# Altium PCB linkit-v4-0.3_6layers.PcbDoc (part 2 of 6)
Units mm, origin at the board's own origin, x right, y up, seen from the top; angles counter-clockwise.
Board outline 70 x 35 mm, 6 copper layers (Top Layer, Int1 (GND), Int2 (Sign), Int3 (Sign), Int4 (PWR), Bottom Layer), stack 1.551 mm thick; 185 components, 156 nets, 761 pads, 1071 vias.
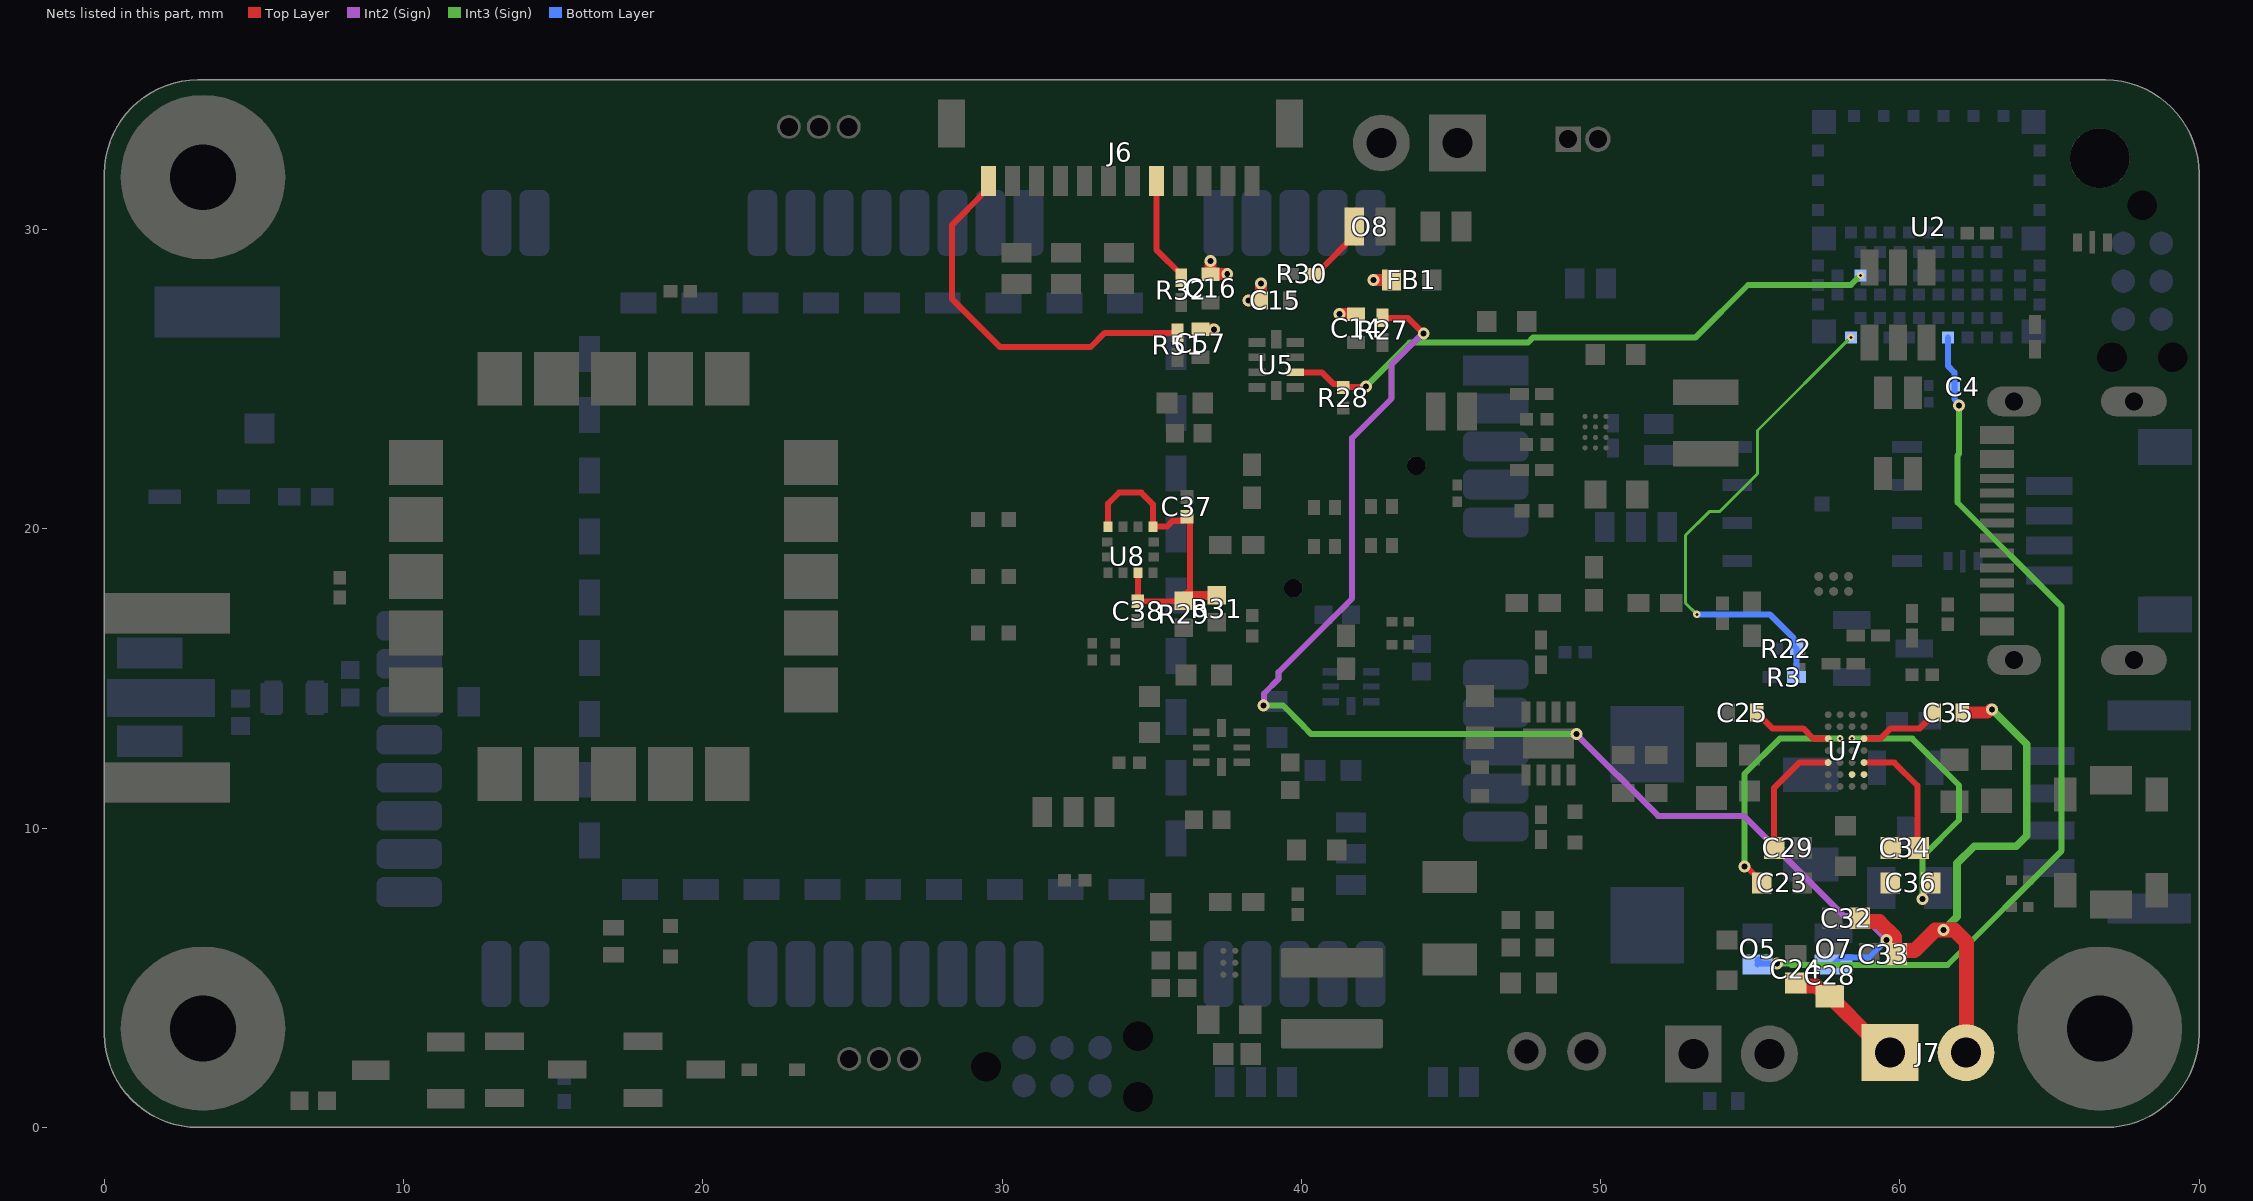
[diagram p6: the nets of this part, all layers, seen from the top]

## Footprints (in the part's own frame and the unit in brackets; to place one, negate y for a bottom-side part, rotate by r counter-clockwise, add the part's x,y. Pads: shape width x height; smd on the part's side, far side on the other; paste and mask are expansions set on the pad) (continued)
"KIM2 FOOTPRINT" [mm] "KIM2-FLEX Module 36.6x25.4x5mm"
  rect 2.2x1 smd mask+0.075: 1(-18.15,7.62)
  round 0.5 on Mech9 paste+0 mask+0.1: 1(-17.55,7.62) 2(-17.55,6.35) 4(-17.55,3.81) 6(-17.55,-2.54) 7(-17.55,-3.81) 9(-17.55,-6.35) 37(5.08,11.95) 40(1.27,11.95) 42(-1.27,11.95) 43(-2.54,11.95) 45(-10.16,11.95) 47(-12.7,11.95) 48(-13.97,11.95)
  rrect50% 2.2x1 smd mask+0.075: 2(-18.15,6.35) 3(-18.15,5.08) 4(-18.15,3.81) 5(-18.15,2.54) 6(-18.15,-2.54) 6(-18.15,-2.54) 7(-18.15,-3.81) 7(-18.15,-3.81) 8(-18.15,-5.08) 8(-18.15,-5.08) 9(-18.15,-6.35) 9(-18.15,-6.35) 10(-18.15,-7.62) 10(-18.15,-7.62) 26(18.15,-9.8) 27(18.15,-8.53) 28(18.15,-7.26) 29(18.15,-5.99) 30(18.15,-4.72) 31(18.15,-3.45) 32(18.15,-2.18) 33(18.15,-0.91)
  round 0.5 on Mech9 paste-127 mask+0: 3(-17.55,5.08) 5(-17.55,2.54) 8(-17.55,-5.08) 10(-17.55,-7.62) 11(-13.97,-11.95) 12(-12.7,-11.95) 13(-11.43,-11.95) 14(-10.16,-11.95) 15(-8.89,-11.95) 16(-2.54,-11.95) 17(-1.27,-11.95) 18(0,-11.95) 19(1.27,-11.95) 20(2.54,-11.95) 21(3.81,-11.95) 22(5.08,-11.95) 23(6.35,-11.95) 24(13.97,-11.95) 25(15.24,-11.95) 26(17.55,-9.8) 27(17.55,-8.53) 28(17.55,-7.26) 29(17.55,-5.99) 30(17.55,-4.72) 31(17.55,-3.45) 32(17.55,-2.18) 33(17.55,-0.91) 34(15.24,11.95) 35(13.97,11.95) 36(6.35,11.95) 38(3.81,11.95) 39(2.54,11.95) 41(0,11.95) 44(-8.89,11.95) 46(-11.43,11.95)
  rrect50% 1x2.2 smd mask+0.075: 11(-13.97,-12.55) 12(-12.7,-12.55) 13(-11.43,-12.55) 14(-10.16,-12.55) 15(-8.89,-12.55) 16(-2.54,-12.55) 17(-1.27,-12.55) 18(0,-12.55) 19(1.27,-12.55) 20(2.54,-12.55) 21(3.81,-12.55) 22(5.08,-12.55) 23(6.35,-12.55) 24(13.97,-12.55) 25(15.24,-12.55) 34(15.24,12.55) 35(13.97,12.55) 36(6.35,12.55) 37(5.08,12.55) 38(3.81,12.55) 39(2.54,12.55) 40(1.27,12.55) 41(0,12.55) 42(-1.27,12.55) 43(-2.54,12.55) 44(-8.89,12.55) 45(-10.16,12.55) 46(-11.43,12.55) 47(-12.7,12.55) 48(-13.97,12.55)
  silkscreen extent -18.8,-13.2 18.8,13.2, body extent -18.32,-12.72 18.33,12.73, height 4.8
"LED RGB 0603" [mm]
  rect 0.5x0.4 smd: 1(-0.65,0.35) 2(-0.65,-0.35) 3(0.65,-0.35) 4(0.65,0.35)
  silkscreen extent -1.26,-0.7 0.25,0.7, body extent -0.8,-0.4 0.8,0.4, height 0.51
LGA12-BMA400 [mm]
  rect 0.3x0.35 smd: 1(-0.75,-0.775) 2(-0.25,-0.775) 3(0.25,-0.775) 4(0.75,-0.775) 7(0.75,0.775) 8(0.25,0.775) 9(-0.25,0.775) 10(-0.75,0.775)
  rect 0.35x0.3 smd: 5(0.775,-0.25) 6(0.775,0.25) 11(-0.775,0.25) 12(-0.775,-0.25)
  round 0.2 on Top Overlay: ""(-0.975,-1.225)
  Top Layer pour cut-out: -1.05,1.05 -1.05,-1.05 1.05,-1.05 1.05,1.05
  body extent -1,-1 1,1, height 1
LQW18AN10NG80D [mm]
  rect 0.57x1.15 smd: 1(-0.715,0) 2(0.715,0)
  silkscreen extent 0,-0.3 0,0.3, body extent -0.82,-0.5 0.82,0.5, height 0.9
"Mounting Hole M2 Plated" [mm]
  round 5.5 hole 2.2: 1(0,0)
"MOUNTING HOLE M2 UNPLATED" [mm]
  round 2 hole 2 unplated mask+0: 0(0,0)
  silkscreen extent -1.5,-1.5 1.5,1.5
MS421R_IV03E [mm]
  rect 1x1 smd paste+0 mask+0: +(2.022,2.032)
  rect 4.2x1.7 smd paste+0 mask+0: -(0.6,-1.85)
  Top Layer region: 0.22,2.705 2.705,2.705 2.705,0.22
R0402 [mm]
  rect 0.51x0.7 smd mask+0.05: 1(-0.45,0) 2(0.45,0)
  body extent -0.52,-0.3 0.52,0.3, height 0.4
RCC0603_e3 [mm]
  rect 0.75x1 smd: 1(-0.75,0) 2(0.75,0)
  body extent -0.77,-0.42 0.78,0.43, height 0.45
RES0201L [mm]
  rect 0.36x0.32 smd: 1(-0.28,0) 2(0.28,0)
  body extent -0.31,-0.16 0.31,0.16, height 0.3
RES0201N [mm]
  rect 0.46x0.42 smd: 1(-0.33,0) 2(0.33,0)
  silkscreen extent -0.5,-0.38 0.5,0.37, body extent -0.31,-0.16 0.31,0.16, height 0.3
RES0402L [mm]
  rect 0.5x0.45 smd: 1(-0.4,0) 2(0.4,0)
  body extent -0.55,-0.27 0.55,0.28, height 0.35
RES0402N [mm]
  rect 0.62x0.62 smd: 1(-0.45,0) 2(0.45,0)
  silkscreen extent -0.95,-0.5 0.95,0.5, body extent -0.52,-0.27 0.53,0.28, height 0.4
RES0402N_NF [mm]
  rect 0.62x0.62 smd: 1(-0.45,0) 2(0.45,0)
  silkscreen extent -0.95,-0.5 0.95,0.5
RESC0603X26N [mm]
  rect 0.44x0.42 smd: 1(-0.34,0) 2(0.34,0)
  body extent -0.3,-0.15 0.3,0.15, height 0.26
RESC0603X28N [mm]
  rect 0.625x0.4 smd: 1(-0.412,0) 2(0.412,0)
  body extent -0.3,-0.15 0.3,0.15, height 0.28
RESC1005X40N [mm]
  rect 0.75x0.6 smd: 1(-0.55,0) 2(0.55,0)
  body extent -0.49,-0.25 0.51,0.25, height 0.35
RESC2012X60N [mm]
  rect 0.95x1.4 smd: 1(-0.95,0) 2(0.95,0)
  silkscreen extent 0,-0.53 0,0.53, body extent -1,-0.63 1,0.63, height 0.6
RESC3216X55N [mm]
  rect 1.15x1.85 smd: 1(-1.5,0) 2(1.5,0)
  silkscreen extent 0,-0.7 0,0.7, body extent -1.6,-0.8 1.6,0.8, height 0.55
S2BPHKS [mm]
  round 1.3 hole 0.8: 1(0,0) 2(-2,0)
  silkscreen extent -3.95,-1.35 1.95,2.49, body extent -3.95,-1.35 1.95,6.25, height 4.9
SAMM10Q00B [mm]
  rect 1.8x1.5 smd: 1(-6.6,3.8) 2(-6.6,1.9) 3(-6.6,0) 4(-6.6,-1.9) 5(-6.6,-3.8) 11(6.6,-3.8) 12(6.6,-1.9) 13(6.6,0) 14(6.6,1.9) 15(6.6,3.8)
  rect 1.5x1.8 smd: 6(-3.8,-6.6) 7(-1.9,-6.6) 8(0,-6.6) 9(1.9,-6.6) 10(3.8,-6.6) 16(3.8,6.6) 17(1.9,6.6) 18(0,6.6) 19(-1.9,6.6) 20(-3.8,6.6)
  silkscreen extent -8.35,-7.75 7.75,7.75, body extent -7.75,-7.75 7.75,7.75, height 6.3
SMT-JUMPER_2_NC_TRACE_SILK [mil] "SMT-JUMPER_2_NC_TRACE_SILK"
  rect 26x50 smd paste+0: 1(-20.5,0) 2(20.5,0)
  Top Layer region: -27.75,5.25 1.25,5.25 1.25,-5.25 -27.75,-5.25
  Top Layer region: -1.25,5.25 27.75,5.25 27.75,-5.25 -1.25,-5.25
SMT-JUMPER_2_NO_TRACE_SILK [mil] "SMT-JUMPER_2_NC_TRACE_SILK"
  rect 26x39.37 smd paste+0: 1(-20.5,0) 2(20.5,0)
SMT-JUMPER_3_2-NCLEFT_TRACE_SILK [mil] "SMT-JUMPER_3_2-NC_TRACE_SILK"
  rect 26x39.37 smd paste+0: 1(-41,0) 2(0,0) 3(41,0)
  Top Layer region: -48.75,5.25 -19.75,5.25 -19.75,-5.25 -48.75,-5.25
  Top Layer region: -21.25,5.25 10,5.25 10,-5.25 -21.25,-5.25
SOD2512X80N [mm]
  rect 1.1x0.5 smd: 1(-1.15,0) 2(1.15,0)
  silkscreen extent -1.7,-0.62 0.85,0.62, body extent -1.25,-0.63 1.25,0.63, height 0.8
SODFL1608X65N [mm]
  rect 0.53x0.42 smd: 1(-0.8,0) 2(0.8,0)
  silkscreen extent -0.33,-0.4 0.33,0.4, body extent -0.8,-0.41 0.8,0.42, height 0.61
SON50P200X200X80-9N [mm]
  rect 0.7x0.3 smd: 1(-1.05,0.75) 2(-1.05,0.25) 3(-1.05,-0.25) 4(-1.05,-0.75) 5(1.05,-0.75) 6(1.05,-0.25) 7(1.05,0.25) 8(1.05,0.75)
  rect 1x1.7 smd: 9(0,0)
  silkscreen extent -1.52,1.27 -1.28,1.52, body extent -1.05,-1 1.05,1, height 0.8
SON127P600X80_HS-9N [mm]
  rect 1x0.4 smd: 1(-2.84,1.905) 2(-2.84,0.635) 3(-2.84,-0.635) 4(-2.84,-1.905) 5(2.84,-1.905) 6(2.84,-0.635) 7(2.84,0.635) 8(2.84,1.905)
  rect 0.5x0.5 smd paste-1.7: 9(0,0)
  Top Layer region: -1.7,1.999 1.7,1.999 1.7,-2.001 -1.7,-2.001
  silkscreen extent -3.5,-2.6 3.1,2.65, body extent -3,-2.5 3,2.5, height 0.8
SOT95P237X112-3N [mm]
  rect 1.3x0.6 smd: 1(-1.05,0.95) 2(-1.05,-0.95) 3(1.05,0)
  silkscreen extent -1.7,-1.46 0.05,1.5, body extent -1.18,-1.46 1.18,1.46, height 1.12
SOT95P280X140-3N [mm]
  rect 1.25x0.65 smd: 1(-1.25,0.95) 2(-1.25,-0.95) 3(1.25,0)
  silkscreen extent -1.88,-1.45 0.27,1.53, body extent -1.4,-1.45 1.4,1.45, height 1.4
SOT95P280X145-6N [mm]
  rect 1.2x0.6 smd: 1(-1.25,0.95) 2(-1.25,0) 3(-1.25,-0.95) 4(1.25,-0.95) 5(1.25,0) 6(1.25,0.95)
  silkscreen extent -1.85,-1.46 0.3,1.6, body extent -1.4,-1.46 1.4,1.46, height 1.45
SOT96P237X111-3N [mm]
  rect 1.25x0.6 smd: 1(-1.05,0.955) 2(-1.05,-0.955) 3(1.05,0)
  silkscreen extent -1.67,-1.46 0.07,1.51, body extent -1.18,-1.46 1.18,1.46, height 1.11
SOT96P240X115-3N [mm]
  rect 1.15x0.6 smd: 1(-1.1,0.96) 2(-1.1,-0.96) 3(1.1,0)
  silkscreen extent -1.67,-1.45 0.18,1.51, body extent -1.2,-1.45 1.2,1.45, height 1.15
SPARKFUN_PRT-14417 [mm]
  rect 0.6x1.55 smd: 1(-1.5,2.45) 2(-0.5,2.45) 3(0.5,2.45) 4(1.5,2.45)
  rect 1.2x1.8 smd: S1(-2.8,-1.425) S2(2.8,-1.425)
  silkscreen extent -3,-2.13 3,3.85, body extent -3,-2.03 3,2.92, height 2.96
stm32wl-SMD_noLegs [mm]
  rect 0.7x1.2 smd: 0(0.2,1.905) 1(0.2,3.937) 2(0.2,5.969) 3(0.2,8.001) 4(0.2,10.033) 5(0.2,12.065) 6(0.2,14.097) 7(0.2,16.129) 8(0.2,18.161) 18(19.8,18.095) 19(19.8,16.063) 20(19.8,14.031) 21(19.8,11.999) 22(19.8,9.967) 23(19.8,7.935) 24(19.8,5.903) 25(19.8,3.871) 26(19.8,1.839)
  rect 1.2x0.7 smd: 9(1.9,19.8) 10(3.932,19.8) 11(5.964,19.8) 12(7.996,19.8) 13(10.028,19.8) 14(12.06,19.8) 15(14.092,19.8) 16(16.124,19.8) 17(18.156,19.8) 27(18.111,0.2) 28(16.079,0.2) 29(14.047,0.2) 30(12.015,0.2) 31(9.983,0.2) 32(7.951,0.2) 33(5.919,0.2) 34(3.887,0.2) 35(1.855,0.2)
  silkscreen extent 0,0 20,20, body extent 0,0 20,20, height 2.05
TC2030NL [mm]
  round 0.787 smd paste-0.787: 1(1.27,-0.635) 2(1.27,0.635) 3(2.54,-0.635) 4(2.54,0.635) 5(3.81,-0.635) 6(3.81,0.635)
  round 0.65 hole 0.991 unplated: H1(0,0) H2(5.08,1.016) H3(5.08,-1.016)
TL1015 [mm]
  rect 0.95x1.4 smd: 1(-2.075,0) 2(2.075,0)
  rect 1.15x0.75 smd: G1(-1.6,1.525) G2(1.6,1.525) G3(1.6,-1.525) G4(-1.6,-1.525)
  silkscreen extent -2.38,-1.6 2.38,1.6, body extent -2.3,-1.5 2.3,1.5, height 2
TPS22960RSER [mm]
  rect 0.55x0.25 smd: 1(-0.675,0.5) 3(-0.675,-0.5) 5(0.675,-0.5) 7(0.675,0.5)
  rect 0.55x0.2 smd: 2(-0.675,0) 6(0.675,0)
  rect 0.3x0.6 smd: 4(0,-0.65) 8(0,0.65)
  silkscreen extent -1.45,0.5 -1.35,0.6, body extent -0.75,-0.75 0.75,0.75, height 0.7
U.FL-R-SMT-1(10) [mm]
  rect 1.05x2.2 smd: 1(-1.475,0) 2(1.475,0)
  rect 1.05x1.05 smd: 3(0,1.525)
  body extent -1.5,-1.5 1.5,1.6, height 1.25
VLP-400-F [mm]
  round 0.62 hole 0.62 unplated paste-2539.97 mask-0.1: 1(-2.05,2.05) 2(2.05,-2.05)
  silkscreen extent -2.4,-2.4 2.41,2.41, body extent -2.34,-2.34 2.35,2.35, height 10.16
WE-CNSW-SMD [mm]
  rect 1.1x0.6 smd: 1(-1.35,-0.5) 2(1.35,-0.5) 3(1.35,0.5) 4(-1.35,0.5)
  silkscreen extent -1.37,-1.32 0.57,0.9, body extent -1.6,-0.8 1.6,0.8, height 1.8
XEL4020 [mm]
  rrect10% 0.98x3.4 smd: 1(-1.185,0) 2(1.185,0)
  body extent -2.15,-2.15 2.15,2.15, height 2.1
YFF15PC [mm]
  rect 0.3x0.6 smd: 1(-0.5,0) 2(0.5,0)
  rect 0.19x0.75 smd paste-0.19 mask-0.19: 3(0,0)
  silkscreen extent -0.8,-0.52 0.8,0.5, body extent -0.5,-0.3 0.5,0.3, height 0.31

## Part data
BT1: library part RELOWABLE_BATTERY_MS421R, "SEIKO Reflowable Lithium Batteries", DeviceName=_MS421R, DeviceSetName=RELOWABLE_BATTERY, GateName_1=G$1, LibraryName=SparkFun-Batteries, PROD_ID=BAT-16685, SymbolName_1=BATTERY
C1 C21: "Multilayer Ceramic Capacitors MLCC - SMD/SMT 1 uF 25 VDC 10% 0402 X5R", Manufacturer_Name="Murata Electronics", Mouser Part Number=81-GRM155R61E105KE1D, Arrow Part Number=GRM155R61E105KE11D, Arrow Price/Stock=https://www.arrow.com/en/products/grm155r61e105ke11d/murata-manufacturing?region=nac, Datasheet Link=http://www.murata.com/~/media/webrenewal/support/library/catalog/products/capacitor/mlcc/c02e.pdf, Height=0.55mm, Manufacturer_Part_Number=GRM155R61E105KE11D, Mouser Price/Stock=https://www.mouser.co.uk/ProductDetail/Murata-Electronics/GRM155R61E105KE11D?qs=QzBtWTOodeUQ00WJlpqFiw%3D%3D
C2: "Multilayer Ceramic Capacitors MLCC - SMD/SMT 1 uF 16 VDC 10% 0603 X7R AEC-Q200", Manufacturer_Name="Murata Electronics", Mouser Part Number=81-GCM188R71C105K64D, Arrow Part Number=GCM188R71C105KA64D, Arrow Price/Stock=https://www.arrow.com/en/products/gcm188r71c105ka64d/murata-manufacturing?region=nac, Datasheet Link=https://search.murata.co.jp/Ceramy/image/img/A01X/G101/ENG/GCM188R71C105KA64-04A.pdf, Height=0.9mm, Manufacturer_Part_Number=GCM188R71C105KA64D, Mouser Price/Stock=https://www.mouser.co.uk/ProductDetail/Murata-Electronics/GCM188R71C105KA64D?qs=bQrJpfqjX%252BKtVgLYIBGvIg%3D%3D
C3 C4 C6: library part "CAP CER 100NF 0201 35V 10% X5R", "CAP CER 100NF 0201 35V 10% X5R", Dielectric=X5R, Manufacturer=Murata, Manufacturers Part Number=GRM033R6YA104KE14D, Supplier Part Number 1=81-GRM33R6YA104KE14D, Tolerance=10%, Size=0201, Supplier 1=Mouser, Supplier 2=Digi-Key, Supplier Part Number 2=490-10430-1-ND
C5 C7: library part "CAP FEEDTHRU 470NF 0402 6.3V +50%/-20%", "CAP FEEDTHRU 470NF 0402 6.3V +50%/-20%", Manufacturer=TDK, Manufacturers Part Number=YFF15PC0J474M, Supplier Part Number 1=810-CKD710JB0J474S, Tolerance=+50%/-20%, Voltage=6.3V, Size=0402, Supplier 1=Mouser, Supplier 2=Digi-Key, Supplier Part Number 2=445-8050-1-ND
C8 C10 C13 C22 C27 C44 C45: "Multilayer Ceramic Capacitors MLCC - SMD/SMT 0.1 uF 16 VDC 10% 0402 X7R", Capacitance=100nF, Case Code (Imperial)=0402, Case Code (Metric)=1005, Dielectric=X7R, Dielectric Material=Ceramic, Manufacturer=YAGEO, Manufacturer 1=Murata, Manufacturer_Part_Number=CC0402KRX7R7BB104, Max Operating Temperature=125°C, Min Operating Temperature=-55°C, Package=C0402, Package Quantity=1, Supplier Part Number 1=81-GRM155R71C104KA88, Tolerance=10%, Voltage=16V, Case/Package=0402, Category 1="Ceramic Capacitors", ComponentLink1Description=https://datasheet.ciiva.com/129/grm155r71c104ka88-01-129739.pdf?src-supplier=Digi-Key, ComponentLink1URL=https://datasheet.ciiva.com/129/grm155r71c104ka88-01-129739.pdf?src-supplier=Digi-Key, ComponentLink2Description=https://datasheet.ciiva.com/129/grm155r71c104ka88-01-129740.pdf?src-supplier=Digi-Key, ComponentLink2URL=https://datasheet.ciiva.com/129/grm155r71c104ka88-01-129740.pdf?src-supplier=Digi-Key, ComponentLink3Description=https://datasheet.ciiva.com/29199/454098-da-01-en-vs-kondensator-0402-29199799.pdf?src-supplier=Conrad, ComponentLink3URL=https://datasheet.ciiva.com/29199/454098-da-01-en-vs-kondensator-0402-29199799.pdf?src-supplier=Conrad, ComponentLink4Description=https://datasheet.ciiva.com/7937/4360-7937615.pdf?src-supplier=Element14, ComponentLink4URL=https://datasheet.ciiva.com/7937/4360-7937615.pdf?src-supplier=Element14, ComponentLink5Description=https://datasheet.ciiva.com/14116/grmseries-highdielectrictype-eng-14116878.pdf?src-supplier=Distrelec, ComponentLink5URL=https://datasheet.ciiva.com/14116/grmseries-highdielectrictype-eng-14116878.pdf?src-supplier=Distrelec, ComponentLink6Description=https://datasheet.ciiva.com/14103/grmseries-highdielectrictype-eng-14103750.pdf?src-supplier=Distrelec, ComponentLink6URL=https://datasheet.ciiva.com/14103/grmseries-highdielectrictype-eng-14103750.pdf?src-supplier=Distrelec, ComponentLink7Description=https://datasheet.ciiva.com/28534/4360-28534127.pdf?src-supplier=Element14, ComponentLink7URL=https://datasheet.ciiva.com/28534/4360-28534127.pdf?src-supplier=Element14, ComponentLink8Description=https://datasheet.ciiva.com/28534/4360-28534133.pdf?src-supplier=Element14, ComponentLink8URL=https://datasheet.ciiva.com/28534/4360-28534133.pdf?src-supplier=Element14, Depth=0.5mm, Description 1="0402 0.1 uF 16V ±10 % Tolerance X7R SMT Multilayer Ceramic Capacitor", Height=0.5mm, Lead Free="Lead Free", Length=1mm, Manufacturer Part Number 1=GRM155R71C104KA88D, Material=Ceramic, Mount="Surface Mount", Number of Pins=2, Packaging="Tape and Reel", Pricing 1="1=0,1, 10=0,017, 50=0,017, 100=0,01, 1000=0,008, 10000=0,005 (USD)", Radiation Hardening=No, Reach SVHC Compliant=Unknown, RoHS 1=Yes, RoHS Compliant=Yes, Series=GRM, Stock 1=7816691, Supplier 1=Mouser, Termination=SMD/SMT, Thickness=0.022inch, Voltage Rating=16V, Voltage Rating (DC)=16V, Width=0.02inch
C9 C11 C12 C43 C46: library part GRM155Z71A105KE01J, "Multilayer Ceramic Capacitors MLCC - SMD/SMT 1.0UF 10V 10% 0402", Manufacturer 1=Murata, Manufacturer_Name="Murata Electronics", Mouser Part Number=81-GRM155Z71A105KE1J, Arrow Part Number=GRM155Z71A105KE01J, Arrow Price/Stock=https://www.arrow.com/en/products/grm155z71a105ke01j/murata-manufacturing?region=nac, Category 1="Ceramic Capacitors", Category 2="Ceramic Capacitors", Datasheet Link=http://www.murata.com/~/media/webrenewal/support/library/catalog/products/capacitor/mlcc/c02e.pdf, Description 1="Multi-Layer Ceramic Capacitor 1uF X7R 10% 0402 Paper T/R", Description 2="Multi-Layer Ceramic Capacitor 1uF X7R 10% 0402 Paper T/R", Height=0.55mm, Manufacturer 2=Murata, Manufacturer Part Number 1=GRM155Z71A105KE01J, Manufacturer Part Number 2=GRM155Z71A105KE01J, Manufacturer_Part_Number=GRM155Z71A105KE01J, Mouser Price/Stock=https://www.mouser.co.uk/ProductDetail/Murata-Electronics/GRM155Z71A105KE01J?qs=xZ%2FP%252Ba9zWqaF%2FmyRgV0iOA%3D%3D, Pricing 1="1=0,1, 10=0,069, 50=0,069, 100=0,031, 1000=0,018, 10000=0,013 (USD)", Pricing 2="1=0,1, 10=0,063, 50=0,0344, 100=0,0281, 500=0,02006, 1000=0,01577, 2500=0,01433, 5000=0,01319 (USD)", RoHS 1=Yes, RoHS 2=Yes, Stock 1=804340, Stock 2=80025, Supplier 1=Mouser, Supplier 2=Digi-Key, Supplier Part Number 1=81-GRM155Z71A105KE1J, Supplier Part Number 2=490-GRM155Z71A105KE01JCT-ND
C14 C15 C16 C57: "Multilayer Ceramic Capacitors MLCC - SMD/SMT 0.01 uF 35 VDC 2% 0402 C0G (NP0)", Manufacturer_Name="Murata Electronics", Mouser Part Number=81-GRM1555CYA103GE1D, Datasheet Link=https://search.murata.co.jp/Ceramy/image/img/A01X/G101/ENG/GRM1555CYA103GE01-01A.pdf, Height=0.33mm, Manufacturer_Part_Number=GRM1555CYA103GE01D, Mouser Price/Stock=https://www.mouser.co.uk/ProductDetail/Murata-Electronics/GRM1555CYA103GE01D?qs=d0WKAl%252BL4Kaxz4NKPx2xBA%3D%3D
C17: library part CL03A105KP3NSNC, "Multilayer Ceramic Capacitors MLCC - SMD/SMT 1uF+/-10% 10V X5R 06 0201", Manufacturer_Name=SAMSUNG, Mouser Part Number=187-CL03A105KP3NSNC, Datasheet Link=https://datasheet.datasheetarchive.com/originals/distributors/DKDS-19/372696.pdf, Geometry.Height=0.35mm, Manufacturer_Part_Number=CL03A105KP3NSNC, Mouser Price/Stock=https://www.mouser.co.uk/ProductDetail/Samsung-Electro-Mechanics/CL03A105KP3NSNC?qs=47mY1nHWefQ3GOjXGTFrfg%3D%3D
C18 C37 C38 C39 C40: library part GRM033Z71C104KE14D, "Multilayer Ceramic Capacitors MLCC - SMD/SMT .1UF     16V   10%        0201", Case/Package=0201, Manufacturer 1=Murata, Manufacturer_Name="Murata Electronics", Mouser Part Number=81-GRM033Z71C104KE4D, Category 1="Ceramic Capacitors", Datasheet Link=http://www.murata.com/~/media/webrenewal/support/library/catalog/products/capacitor/mlcc/c02e.pdf, Description 1="Cap Ceramic 0.1uF 16V X7R 10% Pad SMD 0201 125C T/R", Geometry.Height=0.33mm, Manufacturer Part Number 1=GRM033Z71C104KE14D, Manufacturer_Part_Number=GRM033Z71C104KE14D, Mouser Price/Stock=https://www.mouser.co.uk/ProductDetail/Murata-Electronics/GRM033Z71C104KE14D?qs=lEfY3O89AqkdMqrSfAAk2w%3D%3D, Pricing 1="1=0,1, 10=0,017, 50=0,017, 100=0,01, 1000=0,008, 10000=0,006 (USD)", RoHS 1=Yes, RoHS Compliant=Yes, Stock 1=739403, Supplier 1=Mouser, Supplier Part Number 1=81-GRM033Z71C104KE4D
C19: "Multilayer Ceramic Capacitors MLCC - SMD/SMT 100 uF 10 VDC 20% 1206 X5R", Manufacturer_Name="Murata Electronics", Mouser Part Number=81-GRM31CR61A107MA8L, Arrow Part Number=GRM31CR61A107MEA8L, Arrow Price/Stock=https://www.arrow.com/en/products/grm31cr61a107mea8l/murata-manufacturing?region=nac, Datasheet Link=http://www.murata.com/~/media/webrenewal/support/library/catalog/products/capacitor/mlcc/c02e.pdf, Height=1.8mm, Manufacturer_Part_Number=GRM31CR61A107MEA8L, Mouser Price/Stock=https://www.mouser.co.uk/ProductDetail/Murata-Electronics/GRM31CR61A107MEA8L?qs=hd1VzrDQEGidurXiDTJOCg%3D%3D
C20 C54 C55: "Multilayer Ceramic Capacitors MLCC - SMD/SMT 10 uF 10 VDC 20% 0402 X5R", Manufacturer_Name="Murata Electronics", Mouser Part Number=81-GRM155R61A106ME1D, Arrow Part Number=GRM155R61A106ME11D, Arrow Price/Stock=https://www.arrow.com/en/products/grm155r61a106me11d/murata-manufacturing?region=nac, Datasheet Link=http://www.murata.com/~/media/webrenewal/support/library/catalog/products/capacitor/mlcc/c02e.pdf, Height=0.55mm, Manufacturer_Part_Number=GRM155R61A106ME11D, Mouser Price/Stock=https://www.mouser.co.uk/ProductDetail/Murata-Electronics/GRM155R61A106ME11D?qs=xZ%2FP%252Ba9zWqZMJSi57Q8OyA%3D%3D
C23 C36: "Multilayer Ceramic Capacitors MLCC - SMD/SMT 0.47 uF 25 VDC 10% 0603 X7R", Manufacturer_Name="Murata Electronics", Mouser Part Number=81-GRM188R71E474KA12, Arrow Part Number=GRM188R71E474KA12D, Arrow Price/Stock=https://www.arrow.com/en/products/grm188r71e474ka12d/murata-manufacturing?region=nac, Datasheet Link=https://search.murata.co.jp/Ceramy/image/img/A01X/G101/ENG/GRM188R71E474KA12-01A.pdf, Height=0.9mm, Manufacturer_Part_Number=GRM188R71E474KA12D, Mouser Price/Stock=https://www.mouser.co.uk/ProductDetail/Murata-Electronics/GRM188R71E474KA12D?qs=5VWgUag8BO05DbKPNL84bA%3D%3D
C24: "Multilayer Ceramic Capacitors MLCC - SMD/SMT 0.068 uF 50 VDC 20% 0402 X7R", Manufacturer_Name="Murata Electronics", Arrow Part Number=GRM155R71H683ME14D, Arrow Price/Stock=https://www.arrow.com/en/products/grm155r71h683me14d/murata-manufacturing, Datasheet Link=https://search.murata.co.jp/Ceramy/image/img/A01X/G101/ENG/GRM155R71H683ME14-01A.pdf, Height=0.7mm, Manufacturer_Part_Number=GRM155R71H683ME14D
C25 C35: "Multilayer Ceramic Capacitors MLCC - SMD/SMT 0.022 uF 25 VDC 10% 0402 X7R", Manufacturer_Name="Murata Electronics", Mouser Part Number=81-GRM155R71E223KA6D, Arrow Part Number=GRM155R71E223KA61D, Arrow Price/Stock=https://www.arrow.com/en/products/grm155r71e223ka61d/murata-manufacturing?region=nac, Datasheet Link=https://search.murata.co.jp/Ceramy/image/img/A01X/G101/ENG/GRM155R71E223KA61-01A.pdf, Height=0.33mm, Manufacturer_Part_Number=GRM155R71E223KA61D, Mouser Price/Stock=https://www.mouser.co.uk/ProductDetail/Murata-Electronics/GRM155R71E223KA61D?qs=9U7yHM2lsjSSaDbUOqtIbw%3D%3D
C26 C30: "Multilayer Ceramic Capacitors MLCC - SMD/SMT 963-MSASE168BB5106MT RPLCMT PN 16V 10uF X5R 0603 20%", Manufacturer_Name="TAIYO YUDEN", Mouser Part Number=963-EMK107BBJ106MA-T, Datasheet Link=https://ds.yuden.co.jp/TYCOMPAS/or/specSheet?pn=MSASE168BB5106MTNA01, Height=1mm, Manufacturer_Part_Number=EMK107BBJ106MA-T, Mouser Price/Stock=https://www.mouser.co.uk/ProductDetail/Taiyo-Yuden/EMK107BBJ106MA-T?qs=%252BAZVS4b%2FkgLbAKVTp0R69Q%3D%3D, Parameter 1=10uF
C28: "Multilayer Ceramic Capacitors MLCC - SMD/SMT .01UF 50V 10% 0603", Manufacturer_Name="Murata Electronics", Mouser Part Number=81-GRM39X103K50D, Arrow Part Number=GRM188R71H103KA01D, Arrow Price/Stock=https://www.arrow.com/en/products/grm188r71h103ka01d/murata-manufacturing?region=europe, Datasheet Link=https://search.murata.co.jp/Ceramy/image/img/A01X/G101/ENG/GRM188R71H103KA01-01.pdf, Height=0.9mm, Manufacturer_Part_Number=GRM188R71H103KA01D, Mouser Price/Stock=https://www.mouser.co.uk/ProductDetail/Murata-Electronics/GRM188R71H103KA01D?qs=WWniysbtxULrL2ljbViAbw%3D%3D
C29 C34: "Multilayer Ceramic Capacitors MLCC - SMD/SMT 0.01 uF 25 VDC 10% 0402 X7R", Manufacturer_Name="Murata Electronics", Mouser Part Number=81-GRM36X103K25, Arrow Part Number=GRM155R71E103KA01D, Arrow Price/Stock=https://www.arrow.com/en/products/grm155r71e103ka01d/murata-manufacturing?utm_currency=USD&region=nac, Datasheet Link=https://search.murata.co.jp/Ceramy/image/img/A01X/G101/ENG/GRM155R71E103KA01-01A.pdf, Height=0.7mm, Manufacturer_Part_Number=GRM155R71E103KA01D, Mouser Price/Stock=https://www.mouser.co.uk/ProductDetail/Murata-Electronics/GRM155R71E103KA01D?qs=tOieHv2smhmMGFtkNVb1ug%3D%3D
C31: "Multilayer Ceramic Capacitors MLCC - SMD/SMT 4.7 uF 16 VDC 10% 0603 X5R", Manufacturer_Name="Murata Electronics", Mouser Part Number=81-GRM188R61C475KE1J, Arrow Part Number=GRM188R61C475KE11J, Arrow Price/Stock=null?region=nac, Datasheet Link=https://search.murata.co.jp/Ceramy/image/img/A01X/G101/ENG/GRM188R61C475KE11-01A.pdf, Height=0.9mm, Manufacturer_Part_Number=GRM188R61C475KE11J, Mouser Price/Stock=https://www.mouser.co.uk/ProductDetail/Murata-Electronics/GRM188R61C475KE11J?qs=hNud%2FORuBR3XOr3EtjXAYA%3D%3D
C32: "Multilayer Ceramic Capacitors MLCC - SMD/SMT 680 pF 50 VDC 10% 0402 X7R", Manufacturer_Name="Murata Electronics", Mouser Part Number=81-GRM15R71H681KA01D, Arrow Part Number=GRM155R71H681KA01D, Arrow Price/Stock=https://www.arrow.com/en/products/grm155r71h681ka01d/murata-manufacturing, Datasheet Link=https://search.murata.co.jp/Ceramy/image/img/A01X/G101/ENG/GRM155R71H681KA01-01A.pdf, Height=0.7mm, Manufacturer_Part_Number=GRM155R71H681KA01D, Mouser Price/Stock=https://www.mouser.com/Search/Refine.aspx?Keyword=81-GRM15R71H681KA01D
C33: "Multilayer Ceramic Capacitors MLCC - SMD/SMT 270 pF 50 VDC 10% 0402 X7R", Manufacturer_Name="Murata Electronics", Mouser Part Number=81-GRM155R71H271KA1J, Datasheet Link=https://search.murata.co.jp/Ceramy/image/img/A01X/G101/ENG/GRM155R71H271KA01-01A.pdf, Height=0.7mm, Manufacturer_Part_Number=GRM155R71H271KA01J, Mouser Price/Stock=https://www.mouser.co.uk/ProductDetail/Murata-Electronics/GRM155R71H271KA01J?qs=tpjTAP4gRjgpE42GcIn2vg%3D%3D
C41: "Multilayer Ceramic Capacitors MLCC - SMD/SMT 10 uF 10 VDC 20% 0603 X5R", Manufacturer_Name="Murata Electronics", Mouser Part Number=81-GRM188R61A106MALJ, Arrow Part Number=GRM188R61A106MAALJ, Arrow Price/Stock=https://www.arrow.com/en/products/grm188r61a106maalj/murata-manufacturing, Datasheet Link=https://psearch.en.murata.com/capacitor/product/GRM188R61A106MAAL%23.html, Height=0.9mm, Manufacturer_Part_Number=GRM188R61A106MAALJ, Mouser Price/Stock=https://www.mouser.co.uk/ProductDetail/Murata-Electronics/GRM188R61A106MAALJ?qs=hNud%2FORuBR0Lq8imX%2F1lYQ%3D%3D
C42: "Multilayer Ceramic Capacitors MLCC - SMD/SMT 22 uF 10 VDC 20% 0603 X5R", Manufacturer_Name="Murata Electronics", Mouser Part Number=81-GRM188R61A226ME5D, Arrow Part Number=GRM188R61A226ME15D, Arrow Price/Stock=https://www.arrow.com/en/products/grm188r61a226me15d/murata-manufacturing?region=nac, Datasheet Link=https://search.murata.co.jp/Ceramy/image/img/A01X/G101/ENG/GRM188R61A226ME15-02A.pdf, Height=0.8mm, Manufacturer_Part_Number=GRM188R61A226ME15D, Mouser Price/Stock=https://www.mouser.co.uk/ProductDetail/Murata-Electronics/GRM188R61A226ME15D?qs=eeBpzGFlv%252B8DV%2FrilzyhAw%3D%3D
C47 C49: library part GEN_CAP_0402, "Generic capacitor", ComponentLink1Description=Mouser, ComponentLink1URL=https://www.mouser.fr/ProductDetail/Murata-Electronics/GCM1555C1H4R7CA16D?qs=jDWTHf1mkXZYnVNtgyfFgw%3D%3D
C50: library part T495D157K010ATE100, "Tantalum Capacitors - Solid SMD 10V 150uF 2917 10% ESR=100mOhms", Cap_Case=7343-31, Manufacturer=Kemet, Supplier Part Number 1=399-8506-1-ND, Tolerance_%=10%, Value1="0.1 ohm", Value2=10V, ValueDisplayed=150uF, AEC Category=Q200, AEC Grade=N/A, AEC Qualified=N, Cap_F=150µF, ComponentLink1Description="Datasheet link", ComponentLink1URL=http://www.kemet.com/Lists/ProductCatalog/Attachments/261/KEM_T2009_T495.pdf, CompType=Capacitor, ESR_ohm=1d, IRMS_A=1.225A, LatestRevisionDate=2017-03-09, LatestRevisionNote="Updated supplier links", MountType=SMT, PackageReference=7343-31, PartNumber=T495D157K010ATE100, Polarized=Y, Publisher="Texas Instruments", RoHS=Y, Series=T495, SizeArea_mm2=31.39, SizeAreaWB_mm2=58.59, SizeX_mm=7.3, SizeY_mm=4.3, SizeZ_mm=3.1, Supplier 1=Digi-Key, Supplier 2=Newark, Supplier 3=Mouser, Supplier Part Number 2=40K0920, Supplier Part Number 3=80-T495D157K010, TaMax_C=125°C, TaMin_C=-55°C, Technology=TA, U/M=EA, VDC_V=10V
C51: "Multilayer Ceramic Capacitors MLCC - SMD/SMT 4.7 uF 10 VDC 20% 0603 X7R", Case/Package=0603, Manufacturer=Murata, Manufacturer_Name="Murata Electronics", Mouser Part Number=81-GRM188Z71A475ME5D, Category="Ceramic Capacitors", Datasheet Link=http://componentsearchengine.com/Datasheets/1/GRM188Z71A475ME15D.pdf, Height=0.9mm, Manufacturer Part Number=GRM188Z71A475ME15D, Manufacturer_Part_Number=GRM188Z71A475ME15D, Mouser Price/Stock=https://www.mouser.co.uk/ProductDetail/Murata-Electronics/GRM188Z71A475ME15D?qs=Ey7%2FXF42M3f7ZZnF1u%2FoMQ%3D%3D, Pricing 1="1=0,2, 10=0,139, 50=0,0928, 100=0,0789, 500=0,0557, 1000=0,04873 (USD)", RoHS=Yes, Stock 1=6936, Supplier 1=Digi-Key
C52 C53: "Multilayer Ceramic Capacitors MLCC - SMD/SMT 2.2 uF 10 VDC 20% 0402 X5R", Manufacturer_Name="Murata Electronics", Mouser Part Number=81-GRM155R61A225ME5D, Arrow Part Number=GRM155R61A225ME95D, Arrow Price/Stock=https://www.arrow.com/en/products/grm155r61a225me95d/murata-manufacturing, Datasheet Link=http://www.murata.com/~/media/webrenewal/support/library/catalog/products/capacitor/mlcc/c02e.pdf, Height=0.7mm, Manufacturer_Part_Number=GRM155R61A225ME95D, Mouser Price/Stock=https://www.mouser.co.uk/ProductDetail/Murata-Electronics/GRM155R61A225ME95D?qs=eeBpzGFlv%252B9Q12VVb4vywQ%3D%3D
C56 C58: "Multilayer Ceramic Capacitors MLCC - SMD/SMT 1 uF 50 VDC 20% 0402 X5R", Case/Package=343Case, Dielectric=1537DielectricType, Manufacturer=Murata, Max Operating Temperature=85°C, Min Operating Temperature=-55°C, Supplier Part Number=81-GRM155R61H105ME5J, Tolerance=20%, Voltage Rating=50V, Category="Ceramic Capacitors", Height=600um, Length=1mm, Manufacturer Part Number=GRM155R61H105ME05J, Material=4241ConductorMaterial, Pricing="1=0,1, 10=0,045, 50=0,045, 100=0,027, 1000=0,02, 10000=0,014 (USD)", RoHS=Yes, RoHS Compliant=5897YesNo, Stock=30797, Supplier=Mouser, Thickness=500um, Voltage Rating (DC)=50V, Width=500um
D1: "Schottky Diodes & Rectifiers 40V,Schottky,SOD-523,0.3A", Manufacturer_Name=Nexperia, Mouser Part Number=N/A, Datasheet Link=https://4donline.ihs.com/images/VipMasterIC/IC/NEXP/NEXP-S-A0012401467/NEXP-S-A0012401473-1.pdf?hkey=EF798316E3902B6ED9A73243A3159BB0, Height=0.65mm, Manufacturer_Part_Number=RB751S40, Mouser Price/Stock=https://www.mouser.co.uk/ProductDetail/Nexperia/RB751S40?qs=vHuUswq2%252BsxYe2VJDNOssA%3D%3D
D2 D3: library part "LED RGB 0603 2MA", "LED RGB 0603 2MA", Colour=RGB, Manufacturer=Kingbright, Supplier Part Number 1=604-APHF1608LQBDZGKC, Distributor 1=EBV, Distributor 2="Future Electronics", Manufacturers Part Number=APHF1608LSEEQBDZGKC, Supplier 1=Mouser, Supplier 2=Digi-Key, Supplier Part Number 2=754-2143-1-ND
D4: "Schottky Diodes & Rectifiers", Manufacturer_Name=Nexperia, Mouser Part Number=N/A, Datasheet Link=https://datasheet.datasheetarchive.com/originals/distributors/Datasheets-25/DSA-487592.pdf, Height=0.8mm, Manufacturer_Part_Number=PMEG4005EJ, Mouser Price/Stock=https://www.mouser.com/Search/Refine.aspx?Keyword=N%2FA
FB1: "Ferrite Beads 600 OHM 25%", Manufacturer_Name="Murata Electronics", Mouser Part Number=81-BLM18HE601SN1D, Arrow Part Number=BLM18HE601SN1D, Arrow Price/Stock=https://www.arrow.com/en/products/blm18he601sn1d/murata-manufacturing?utm_currency=USD&region=nac, Datasheet Link=http://www.murata.com/~/media/webrenewal/support/library/catalog/products/emc/emifil/c31e.ashx?la=en-gb, Height=0.95mm, Manufacturer_Part_Number=BLM18HE601SN1D, Mouser Price/Stock=https://www.mouser.co.uk/ProductDetail/Murata-Electronics/BLM18HE601SN1D?qs=%2F%252BYoplLUB5hymM76VL7Sqw%3D%3D
FB2 FB3 FB4 FB5: "Ferrite Bead - 1000 OHM 25%", Manufacturer_Name="Murata Electronics", Mouser Part Number=81-BLM11A102S, Arrow Part Number=BLM18AG102SN1D, Arrow Price/Stock=https://www.arrow.com/en/products/blm18ag102sn1d/murata-manufacturing?utm_currency=USD&region=nac, Datasheet Link=http://www.murata.com/~/media/webrenewal/support/library/catalog/products/emc/emifil/c31e.ashx?la=en-gb, Height=0.95mm, Manufacturer_Part_Number=BLM18AG102SN1D, Mouser Price/Stock=https://www.mouser.co.uk/ProductDetail/Murata-Electronics/BLM18AG102SN1D?qs=b2kFoOhrN4V4XjRBmusv4w%3D%3D
J1 J12: "CON PLUG OF NAILS 6 PIN FOOTPRINT NO LEGS", Manufacturer=Tag-Connect, Manufacturers Part Number="NOT FITTED PART", Distributor 1=EBV, Distributor 2="Future Electronics", Supplier Part Number 1="NOT FITTED PART", Supplier Part Number 2="NOT FITTED PART"
J2: "Connector, Header 2 pos, 1 row, pitch 1mm", Manufacturer_Name=Preci-Dip, Mouser Part Number=437-8601000210001101, Datasheet Link=https://www.precidip.com/AppHost/9696,1/Scripts/Modules/Catalog/Default.aspx?c=8&i=516&p=101&pdf=1&dsku=860-10-NNN-10-001101, Height=3.63mm, Manufacturer_Part_Number=860-10-002-10-001101, Mouser Price/Stock=https://www.mouser.co.uk/ProductDetail/Preci-dip/860-10-002-10-001101?qs=jrVTBkKbt4YuZ%2FSZyJlz1w%3D%3D
J3 J14: "Connector, Header 3 pos, 1 row, pitch 1mm", Manufacturer_Name=Preci-Dip, Mouser Part Number=437-8601000310001101, Datasheet Link=https://www.precidip.com/en/Products/PCB-Connectors/pview/860-10-NNN-10-001101.html#, Height=3.63mm, Manufacturer_Part_Number=860-10-003-10-001101, Mouser Price/Stock=https://www.mouser.co.uk/ProductDetail/Preci-dip/860-10-003-10-001101?qs=jrVTBkKbt4ZfyeZ%252Bg9GDNA%3D%3D
J4: "USB Connectors USB C Receptacle, Short Body, USB2.0, 16Pin, Horizontal, SMT", Package=None, Check_prices=https://www.snapeda.com/parts/USB4215-03-A/Global+Connector+Technology/view-part/?ref=eda, MF="Global Connector Technology", MP=USB4215-03-A, SnapEDA_Link=https://www.snapeda.com/parts/USB4215-03-A/Global+Connector+Technology/view-part/?ref=snap
J5: "Headers & Wire Housings PH HEADER (SIDE)", Manufacturer_Name="JST (JAPAN SOLDERLESS TERMINALS)", Datasheet Link=https://media.digikey.com/pdf/Data%20Sheets/JST%20PDFs/PH%20Series.pdf, Height=4.8mm, Manufacturer_Part_Number=S2B-PH-K-S
J6: "Headers & Wire Housings Recep 12P R/A 0.8mm Pitch", Manufacturer_Name=Hirose, Manufacturer_Part_Number=DF52-12S-0.8H(21), Mouser Part Number=798-DF52-12S-0.8H21, Datasheet Link=https://www.hirose.com/product/en/products/DF52/DF52-12S-0.8H%2821%29/, Height=1mm, Mouser Price/Stock=https://www.mouser.co.uk/ProductDetail/Hirose-Connector/DF52-12S-0.8H21?qs=%2FKR40Cd6GUo160JXe3226w%3D%3D
J7 J10 J15: "CON HDR 2POS HEADER 2.54MM VERT THRU HOLE", Manufacturer=Harwin, Supplier Part Number 1=952-2261-ND, Distributor 1=EBV, Distributor 2="Future Electronics", Manufacturers Part Number=M20-9990245, Supplier 1=Digi-Key, Supplier 2=Mouser, Supplier Part Number 2=855-M20-9990245
J8: "Headers & Wire Housings GH HEADER (SMT/TOP TYPE)", Arrow Part Number=BM04B-GHS-TBT(LF)(SN)(N), Manufacturer_Name="JST (JAPAN SOLDERLESS TERMINALS)", Mouser Part Number=N/A, Arrow Price/Stock=https://www.arrow.com/en/products/bm04b-ghs-tbt-lf-sn-n/jst-manufacturing?region=europe, Datasheet Link=http://www.jst-mfg.com/product/pdf/eng/eGH.pdf, Height=4.05mm, Manufacturer_Part_Number=BM04B-GHS-TBT(LF)(SN)(N), Mouser Price/Stock=https://www.mouser.co.uk/ProductDetail/JST-Commercial/BM04B-GHS-TBTLFSNN?qs=QpmGXVUTftGHKxacCgPJ1g%3D%3D
J9: "QWIIC JST CONNECTOR - SMD 4-PIN", Package=None, Check_prices=https://www.snapeda.com/parts/PRT-14417/SparkFun+Electronics/view-part/?ref=eda, MF="SparkFun Electronics", MP=PRT-14417, SnapEDA_Link=https://www.snapeda.com/parts/PRT-14417/SparkFun+Electronics/view-part/?ref=snap
J11: "UFL SMT PCB receptable,DC-6GHz Hirose Straight 50 Surface Mount UFL Connector, Receptacle, Solder Termination Coaxial", Dielectric Material=Polymer, Housing Color=Beige, Insulation Resistance=500MR, Manufacturer 1=Hirose, Manufacturer Part Number 1=U.FL-R-SMT-1(10), Max Frequency=6GHz, Max Operating Temperature=90°C, Min Operating Temperature=-40°C, Mouser Part Number=798-U.FL-R-SMT-110, Package Quantity=2500, Body Material=Bronze, Body Plating=Silver, Category 1="RF / Coaxial Connectors", Center Contact Plating=Gold, ComponentLink1Description=https://datasheet.ciiva.com/11762/0900766b8105243f-11762474.pdf?src-supplier=Rs, ComponentLink1URL=https://datasheet.ciiva.com/11762/0900766b8105243f-11762474.pdf?src-supplier=Rs, ComponentLink2Description=https://datasheet.ciiva.com/7651/91524-7651915.pdf?src-supplier=Element14, ComponentLink2URL=https://datasheet.ciiva.com/7651/91524-7651915.pdf?src-supplier=Element14, ComponentLink3Description=https://datasheet.ciiva.com/7651/91524-7651914.pdf?src-supplier=Element14, ComponentLink3URL=https://datasheet.ciiva.com/7651/91524-7651914.pdf?src-supplier=Element14, Connector Type="Receptacle,Male Pin", Contact Material=Brass, Datasheet Link=https://www.hirose.com/product/document?clcode=CL0331-0472-2-10&productname=U.FL-R-SMT-1(10)&series=U.FL&documenttype=2DDrawing&lang=en&documentid=0000940684, Description 1="Rf Connectors / Coaxial Connectors SMT Ml Rec Au 50 Ohm W/anti Sldr Wckng Rl", Fastening Type=SNAP-ON, Impedance=50R, Lead Free="Lead Free", Manufacturer_Name=Hirose, Manufacturer_Part_Number=U.FL-R-SMT-1(10), Mating Cycles=30, Mount="Surface Mount", Mouser Price/Stock=https://www.mouser.co.uk/ProductDetail/Hirose-Connector/U.FL-R-SMT-110?qs=kL1ClTr6oBoOdtqlGQpQrQ%3D%3D, Number of Ports=1, Orientation=Straight, Packaging="Tape and Reel", Pricing 1="1=1,44, 10=1,26, 50=1,26, 100=1,12, 1000=0,803, 10000=0,803 (USD)", RoHS 1=Yes, RoHS Compliant=Yes, Series=U.FL, Stock 1=504085, Supplier 1=Mouser, Supplier Part Number 1=798-U.FL-R-SMT-110, Termination=Solder, Weight=0.001764oz
J13: "SMA End Launch Jack 1.0 mm Board, 50 ohm", Manufacturer="COAX CONNECTORS LTD", Manufacturer_Part_Number=30-462-D3-1.1mm
L1: "Common Mode Chokes / Filters WE-CNSW 1206 370mA 90Ohm 100MHz AECQ200", Manufacturer_Name="Wurth Elektronik", Mouser Part Number=710-744232090, Datasheet Link=https://datasheet.datasheetarchive.com/originals/distributors/Datasheets_SAMA/c4bd373adc4470b1464be5d10e6e206e.pdf, Manufacturer_Part_Number=744232090, Mouser Price/Stock=https://www.mouser.co.uk/ProductDetail/Wurth-Elektronik/744232090?qs=PGXP4M47uW6L5fAiLO6yTw%3D%3D
L2: "Inductor Power Chip Shielded Wirewound 2.2uH 20% 1MHz Metal 2.3A 0.082Ohm DCR 1008 T/R", Manufacturer=Murata, Manufacturer Part Number=DFE252012F-2R2M=P2, Supplier Part Number 1=81-DFE252012F-2R2MP2, Category="Fixed Inductors", ComponentLink1Description=http://www.farnell.com/datasheets/2616790.pdf?src-supplier=Farnell, ComponentLink1URL=http://www.farnell.com/datasheets/2616790.pdf?src-supplier=Farnell, ComponentLink2Description=https://www.murata.com/~/media/webrenewal/products/inductor/chip/tokoproducts/wirewoundmetalalloychiptype/m_dfe252012f.ashx?src-supplier=Digikey, ComponentLink2URL=https://www.murata.com/~/media/webrenewal/products/inductor/chip/tokoproducts/wirewoundmetalalloychiptype/m_dfe252012f.ashx?src-supplier=Digikey, ComponentLink3Description=https://datasheet.octopart.com/DFE252012F-2R2M%3DP2-Murata-datasheet-117010004.pdf?src-supplier=Future+Electronics, ComponentLink3URL=https://datasheet.octopart.com/DFE252012F-2R2M%3DP2-Murata-datasheet-117010004.pdf?src-supplier=Future+Electronics, ComponentLink4Description=https://datasheet.octopart.com/DFE252012F-2R2M%3DP2-Murata-datasheet-142691300.pdf?src-supplier=Arrow.cn, ComponentLink4URL=https://datasheet.octopart.com/DFE252012F-2R2M%3DP2-Murata-datasheet-142691300.pdf?src-supplier=Arrow.cn, Pricing 1="1=0,34, 10=0,221, 50=0,221, 100=0,208, 1000=0,208, 10000=0,176 (USD)", RoHS=Yes, Stock 1=84662, Supplier 1=Mouser
L3 L4: "Thick Film Resistors - SMD Zero ohm Jumper"
L3: library part LQW18AN18NG8ZD, "Inductor Wirewound , 18 nH, 75 Milliohm, ± 2%, 1.4 A, 0603 [1608 Metric]", Supplier Part Number 1=81-LQW18AN18NG8ZD, Supplier 1=Mouser
L5: library part XEL4020-102MEC, "Power Inductors - SMD 1uH Shld 20% 9.6A 14.6mOhms AECQ2", Manufacturer=Coilcraft, Value1="0.0133 ohm", Value2=9A, ValueDisplayed=1uH, AEC Category=Q200, AEC Grade=1, AEC Qualified=Y, ComponentLink1Description="Datasheet link", ComponentLink1URL=http://www.coilcraft.com/pdfs/xel4020.pdf, CompType=Inductor, DCR_ohm=0.0133, Imax_A=9A, Ind_H=1µH, Irms="9.6A @ 40C rise", Isat="9A @ 30% inductance drop", Material=Composite, MountType=SMT, PartNumber=XEL4020-102MEB, RoHS=Y, SizeArea_mm2=16, SizeAreaWB_mm2=25, SizeX_mm=4, SizeY_mm=4, SizeZ_mm=2.1, Technology=Shielded
MEC1: "LIGHT PIPE 10.2mm High Flat Face", Manufacturer="Bivar Inc", Supplier Part Number 1=492-1516-ND, Manufacturers Part Number=VLP-400-F, Supplier 1=Digi-Key, Supplier 2=Mouser, Supplier Part Number 2=749-VLP-400-F
MH1 MH2 MH3 MH4 R29: Manufacturer="NOT FITTED PART", Manufacturers Part Number="NOT FITTED PART"
  MH1 MH2 MH3 MH4: Distributor 1=EBV, Distributor 2="Future Electronics"
  R29: Size=0402, Supplier 1=Mouser, Supplier 2=Digi-Key
O1 O2 O3 O4 O5 O6 O11 O14: library part JUMPER-SMT_2_NO_TRACE_SILK_1, "Normally opened trace jumper     / This jumper has no trace between two pads so it's normally closed (NO).", DeviceName=_SILK, DeviceSetName=JUMPER-SMT_2_NC_TRACE, GateName_1=G$1, LibraryName=SparkFun-Jumpers, SymbolName_1=SMT-JUMPER_2_NC_TRACE
O7 O8 O9: library part JUMPER-SMT_2_NC_TRACE_SILK, "Normally closed trace jumper    This jumper has a trace between two pads so it's normally closed (NC). Use a razor knife to open the connection. For best results follow the IPC guidelines for cutting traces: Cutout at least 0.063 mm (0.005 in).  Remove all loose material to clean up the cut area.  Seal the cut with an approved epoxy.       Reapply solder to reclose the connection.", DeviceName=_SILK, DeviceSetName=JUMPER-SMT_2_NC_TRACE, GateName_1=G$1, LibraryName=SparkFun-Jumpers, SymbolName_1=SMT-JUMPER_2_NC_TRACE
O10 O12 O13 O15: library part JUMPER-SMT_3_2-NCLEFT_TRACE_SILK, "Normally opened lefttrace jumper (1 of 2 connections)    This jumper has a trace between left pad pads so they are normally closed (NC). Use a razor knife to open the connection(s). For best results follow the IPC guidelines for cutting traces: Cutout at least 0.063 mm (0.005 in).  Remove all loose material to clean up the cut area.  Seal the cut with an approved epoxy.       Reapply solder to reclose the connection(s).", DeviceName=_SILK, DeviceSetName=JUMPER-SMT_3_2-NC_TRACE, GateName_1=G$1, LibraryName=SparkFun-Jumpers, SymbolName_1=SMT-JUMPER_3_2-NC_TRACE
Q1: "Bipolar Transistors - BJT NPN GENERAL PURPOSE", Manufacturer_Name=onsemi, Mouser Part Number=863-MMBT3904LT1G, Arrow Part Number=MMBT3904LT1G, Arrow Price/Stock=https://www.arrow.com/en/products/mmbt3904lt1g/on-semiconductor?utm_currency=USD&region=europe, Datasheet Link=https://www.onsemi.com/pub/Collateral/MMBT3904LT1-D.PDF, Height=1.11mm, Manufacturer_Part_Number=MMBT3904LT1G, Mouser Price/Stock=https://www.mouser.co.uk/ProductDetail/onsemi/MMBT3904LT1G?qs=HVbQlW5zcXUYZ2Fy0YF3FQ%3D%3D
Q2: "MOSFET P-CHANNEL ENHANCEMENT MODE", Manufacturer_Name="Diodes Incorporated", Mouser Part Number=621-DMP2305U-7, Arrow Part Number=DMP2305U-7, Arrow Price/Stock=https://www.arrow.com/en/products/dmp2305u-7/diodes-incorporated?utm_currency=USD&region=nac, Datasheet Link=https://www.diodes.com//assets/Datasheets/DMP2305U.pdf, Height=1.15mm, Manufacturer_Part_Number=DMP2305U-7, Mouser Price/Stock=https://www.mouser.co.uk/ProductDetail/Diodes-Incorporated/DMP2305U-7?qs=oUsD4qhOtFyFQmlG8wLVjw%3D%3D
Q3 Q4: "MOSFETs MOSFT P-Ch -4.3A 50mOhm 10nC Log Lvl", Manufacturer_Name=Infineon, Mouser Part Number=942-IRLML6401TRPBF, Arrow Part Number=IRLML6401TRPBF, Arrow Price/Stock=https://www.arrow.com/en/products/irlml6401trpbf/infineon-technologies-ag?utm_currency=USD&region=europe, Datasheet Link=https://www.infineon.com/dgdl/irlml6401pbf.pdf?fileId=5546d462533600a401535668b96d2634, Height=1.12mm, Manufacturer_Part_Number=IRLML6401TRPBF, Mouser Price/Stock=https://www.mouser.co.uk/ProductDetail/Infineon-Technologies/IRLML6401TRPBF?qs=9%252BKlkBgLFf1wviSVMCNr8A%3D%3D
Q5: "MOSFETs 20V P-channel NexFET Pwr MOSFET A 595-CSD75208W1015T", Manufacturer_Name="Texas Instruments", Mouser Part Number=595-CSD75208W1015, Arrow Part Number=CSD75208W1015, Arrow Price/Stock=https://www.arrow.com/en/products/csd75208w1015/texas-instruments?region=nac, Datasheet Link=http://www.ti.com/lit/ds/symlink/csd75208w1015.pdf, Height=0.625mm, Manufacturer_Part_Number=CSD75208W1015, Mouser Price/Stock=https://www.mouser.co.uk/ProductDetail/Texas-Instruments/CSD75208W1015?qs=m%2F7bTylgptfyaJivndQoYw%3D%3D
R1 R2: library part "RES 4.7K 0201 1% 100PPM", "RES 4.7K 0201 1% 100PPM", Supplier Part Number 1=71-CRCW02014K70FKED, Tolerance=1%, PPM=100, Size=0201, Supplier 1=Mouser, Supplier 2=Digi-Key, Supplier Part Number 2=541-4.70KAABCT-ND
R3 R27 R30 R32 R51: library part CRCW02011K00FNED, "Thick Film Resistors - SMD 1/20watt 1Kohms 1% 200ppm", Manufacturer_Name=Vishay, Mouser Part Number=71-CRCW02011K00FNED, Arrow Part Number=CRCW02011K00FNED, Arrow Price/Stock=https://www.arrow.com/en/products/crcw02011k00fned/vishay?region=nac, Datasheet Link=http://www.vishay.com/docs/20035/dcrcwe3.pdf, Height=0.28mm, Manufacturer_Part_Number=CRCW02011K00FNED, Mouser Price/Stock=https://www.mouser.co.uk/ProductDetail/Vishay-Dale/CRCW02011K00FNED?qs=IQLUlsvFoXtTp7ngtIXo7A%3D%3D
R4: "Thick Film Resistors - SMD 1/16watt 10Kohms 5% Commercial Use", Case/Package=343Case, Manufacturer="Vishay Semiconductors", Power Rating=63mW, Resistance=10kR, Supplier Part Number 1=71-CRCW040210K0JNEDC, Tolerance=5%, Voltage Rating=50V, Category="Chip SMD Resistors", ComponentLink1Description=http://www.vishay.com/docs/28773/crcwce3.pdf?src-supplier=Digikey, ComponentLink1URL=http://www.vishay.com/docs/28773/crcwce3.pdf?src-supplier=Digikey, ComponentLink2Description=https://datasheet.octopart.com/CRCW040210K0JNEDC-Vishay-datasheet-100063072.pdf?src-supplier=Future+Electronics, ComponentLink2URL=https://datasheet.octopart.com/CRCW040210K0JNEDC-Vishay-datasheet-100063072.pdf?src-supplier=Future+Electronics, Height=350um, Lead Free=5697LeadFree, Manufacturer Part Number=CRCW040210K0JNEDC, Pricing 1="1=0,1, 10=0,013, 50=0,013, 100=0,007, 1000=0,005, 10000=0,004 (USD)", RoHS=Yes, Stock 1=229087, Supplier 1=Mouser
R5: "Thin Film Resistors - SMD 1/8W 1.33M Ohms 0.1%", Case/Package=339Case, Manufacturer=Yageo, Max Operating Temperature=155°C, Min Operating Temperature=-55°C, Power Rating=125mW, Supplier Part Number=603-RT0805BRD071M33L, Temperature Coefficient=25ppm/°C, Voltage Rating=150V, Category="Chip SMD Resistors", Height=600um, Manufacturer Part Number=RT0805BRD071M33L, Packaging=10Packaging, Pricing="1=0,19, 10=0,135, 50=0,108, 100=0,097, 1000=0,065, 10000=0,043 (USD)", RoHS=Yes, RoHS Compliant=Yes, Stock=4964, Supplier=Mouser
R6: "Thin Film Resistors - SMD Thin Film Chip Resistors 1206 size, 700V, 0.25W, 3.0M ohm, 0.1%, 25ppm AEC Q200", Manufacturer_Name=Susumu, Datasheet Link=https://www.mouser.in/datasheet/2/392/n_catalog_partition39_en-1919331.pdf, Height=0.55mm, Manufacturer_Part_Number=RGV3216P-3004-B-T1
R7 R8: library part "RES 10M 0402 1% 100PPM", "RES 10M 0402 1% 100PPM", Supplier Part Number 1=603-RC0402FR-0710ML, Tolerance=1%, PPM=100, Size=0402, Supplier 1=Mouser, Supplier 2=Digi-Key, Supplier Part Number 2=311-10.0MLRCT-ND
R9 R28: "Thick Film Resistors - SMD 1 MOhms 50 mW 0201 1%", Manufacturer_Name=KEMET, Mouser Part Number=603-RC0201FR-7D1ML, Arrow Part Number=RC0201FR-7D1ML, Arrow Price/Stock=https://www.arrow.com/en/products/rc0201fr-7d1ml/yageo, Datasheet Link=http://www.yageo.com/documents/recent/PYu-RC0201_51_RoHS_L_8.pdf, Height=0.26mm, Manufacturer_Part_Number=RC0201FR-7D1ML, Mouser Price/Stock=https://www.mouser.co.uk/ProductDetail/YAGEO/RC0201FR-7D1ML?qs=NgbZBzc1CyEo5FlGf5N0Ug%3D%3D
R10: "Thick Film Resistors - SMD 0402 1% 10Kohm Anti-Sulfur AEC-Q200", Manufacturer_Name=Panasonic, Mouser Part Number=667-ERJ-U02F1002X, Arrow Part Number=ERJ-U02F1002X, Arrow Price/Stock=https://www.arrow.com/en/products/erj-u02f1002x/panasonic, Datasheet Link=https://industrial.panasonic.com/cdbs/www-data/pdf/RDP0000/AOA0000C334.pdf, Height=0.4mm, Manufacturer_Part_Number=ERJ-U02F1002X, Mouser Price/Stock=https://www.mouser.co.uk/ProductDetail/Panasonic/ERJ-U02F1002X?qs=bKFmlxG1yYBnPvi8EiFM4A%3D%3D
R11: "Thick Film Resistors - SMD 383ohm 1% 200ppm", Manufacturer=Vishay, Supplier Part Number=541-CRCW0201383RFNEDCT-ND, Category="Chip SMD Resistors", ComponentLink1Description=https://datasheet.ciiva.com/5860/1697337-5860072.pdf?src-supplier=Farnell, ComponentLink1URL=https://datasheet.ciiva.com/5860/1697337-5860072.pdf?src-supplier=Farnell, ComponentLink2Description=https://datasheet.ciiva.com/22683/1700795-22683160.pdf?src-supplier=Element14, ComponentLink2URL=https://datasheet.ciiva.com/22683/1700795-22683160.pdf?src-supplier=Element14, Manufacturer Part Number=CRCW0201383RFNED, Pricing="1=0,1, 10=0,041, 100=0,0209, 1000=0,01231, 2500=0,01038, 5000=0,00928 (USD)", RoHS=Yes, Stock=17699, Supplier=Digikey
R12: "Resistor", Manufacturer_Name=Vishay, Arrow Part Number=CRCW020127K4FNED, Arrow Price/Stock=https://www.arrow.com/en/products/crcw020127k4fned/vishay, Datasheet Link=http://www.vishay.com/docs/20035/dcrcwe3.pdf, Height=0.28mm, Manufacturer_Part_Number=CRCW020127K4FNED
R13: "Thick Film Resistors - SMD 1 kOhms 62.5 mW 0402 5%", Case/Package=0402, Manufacturer=Yageo, Supplier Part Number=603-RC0402JR-7D1KL, Tolerance=5%, Category=Resistors, Manufacturer Part Number=RC0402JR-7D1KL, Pricing="1=0,1, 10=0,008, 50=0,008, 100=0,006, 1000=0,004, 10000=0,001 (USD)", RoHS=Yes, RoHS Compliant=Yes, Stock=654509, Supplier=Mouser
R14: "Thick Film Resistors - SMD 330 Ohms 62.5mW 0402 5%", Manufacturer_Name=KEMET, Mouser Part Number=603-RC0402JR-7D330RL, Arrow Part Number=RC0402JR-7D330RL, Arrow Price/Stock=https://www.arrow.com/en/products/rc0402jr-7d330rl/yageo, Datasheet Link=http://www.yageo.com/documents/recent/PYu-RC0402_51_RoHS_L_6_r.pdf, Height=0.4mm, Manufacturer_Part_Number=RC0402JR-7D330RL, Mouser Price/Stock=https://www.mouser.co.uk/ProductDetail/YAGEO/RC0402JR-7D330RL?qs=F5EMLAvA7IAWTmBu9ZK%2FAQ%3D%3D
R15: "Thick Film Resistors - SMD 1/16watt 1.6Kohms 5%", Manufacturer_Name=Vishay, Mouser Part Number=71-CRCW0402J-1.6K-E3, Datasheet Link=http://www.vishay.com/docs/20035/dcrcwe3.pdf, Height=0.4mm, Manufacturer_Part_Number=CRCW04021K60JNED, Mouser Price/Stock=https://www.mouser.co.uk/ProductDetail/Vishay-Dale/CRCW04021K60JNED?qs=YX%252BK5oaHNYoma9PjuMNZCA%3D%3D
R16: library part "RES 10K 0201 1% 100PPM", "RES 10K 0201 1% 100PPM", Supplier Part Number 1=71-CRCW020110K0FKED, Tolerance=1%, PPM=100, Size=0201, Supplier 1=Mouser, Supplier 2=Digi-Key, Supplier Part Number 2=541-10.0KAABCT-ND
R17: library part "RES 0R 0201", "RES 0R 0201", Supplier Part Number 1=71-CRCW02010000Z0ED, Size=0201, Supplier 1=Mouser, Supplier 2=Digi-Key, Supplier Part Number 2=541-0.0AGCT-ND